# Altium PCB Lower.PcbDoc
Units mm, origin at the board's own origin, x right, y up, seen from the top; angles counter-clockwise.
Board outline 55 x 56.25 mm, 2 copper layers (Top Layer, Bottom Layer); 45 components, 39 nets, 169 pads, 32 vias.
Unrouted connection lines stored in the file: 29.
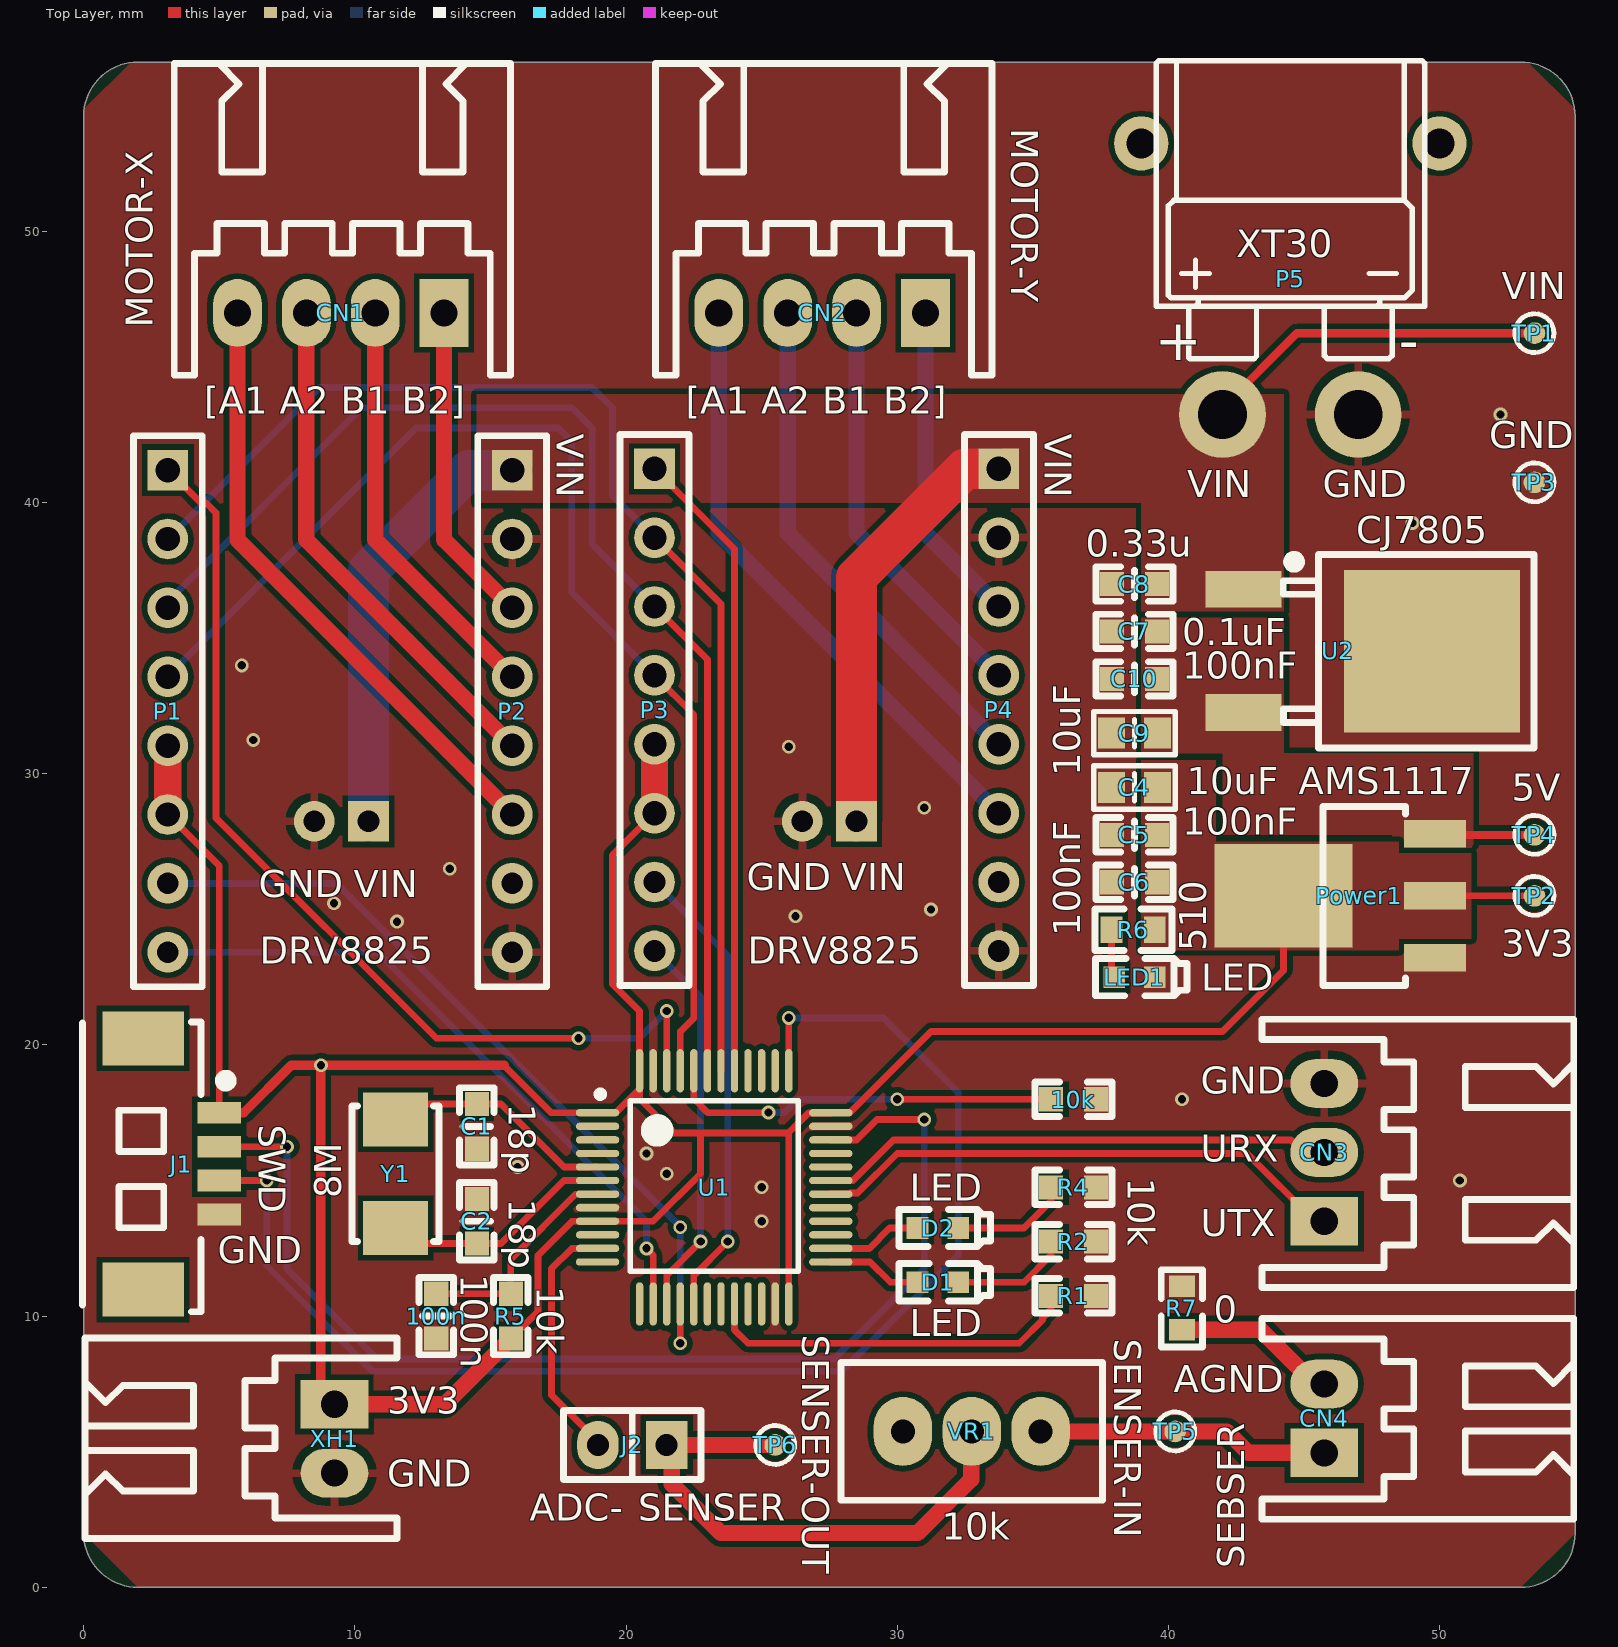
[diagram p0: Top Layer view]
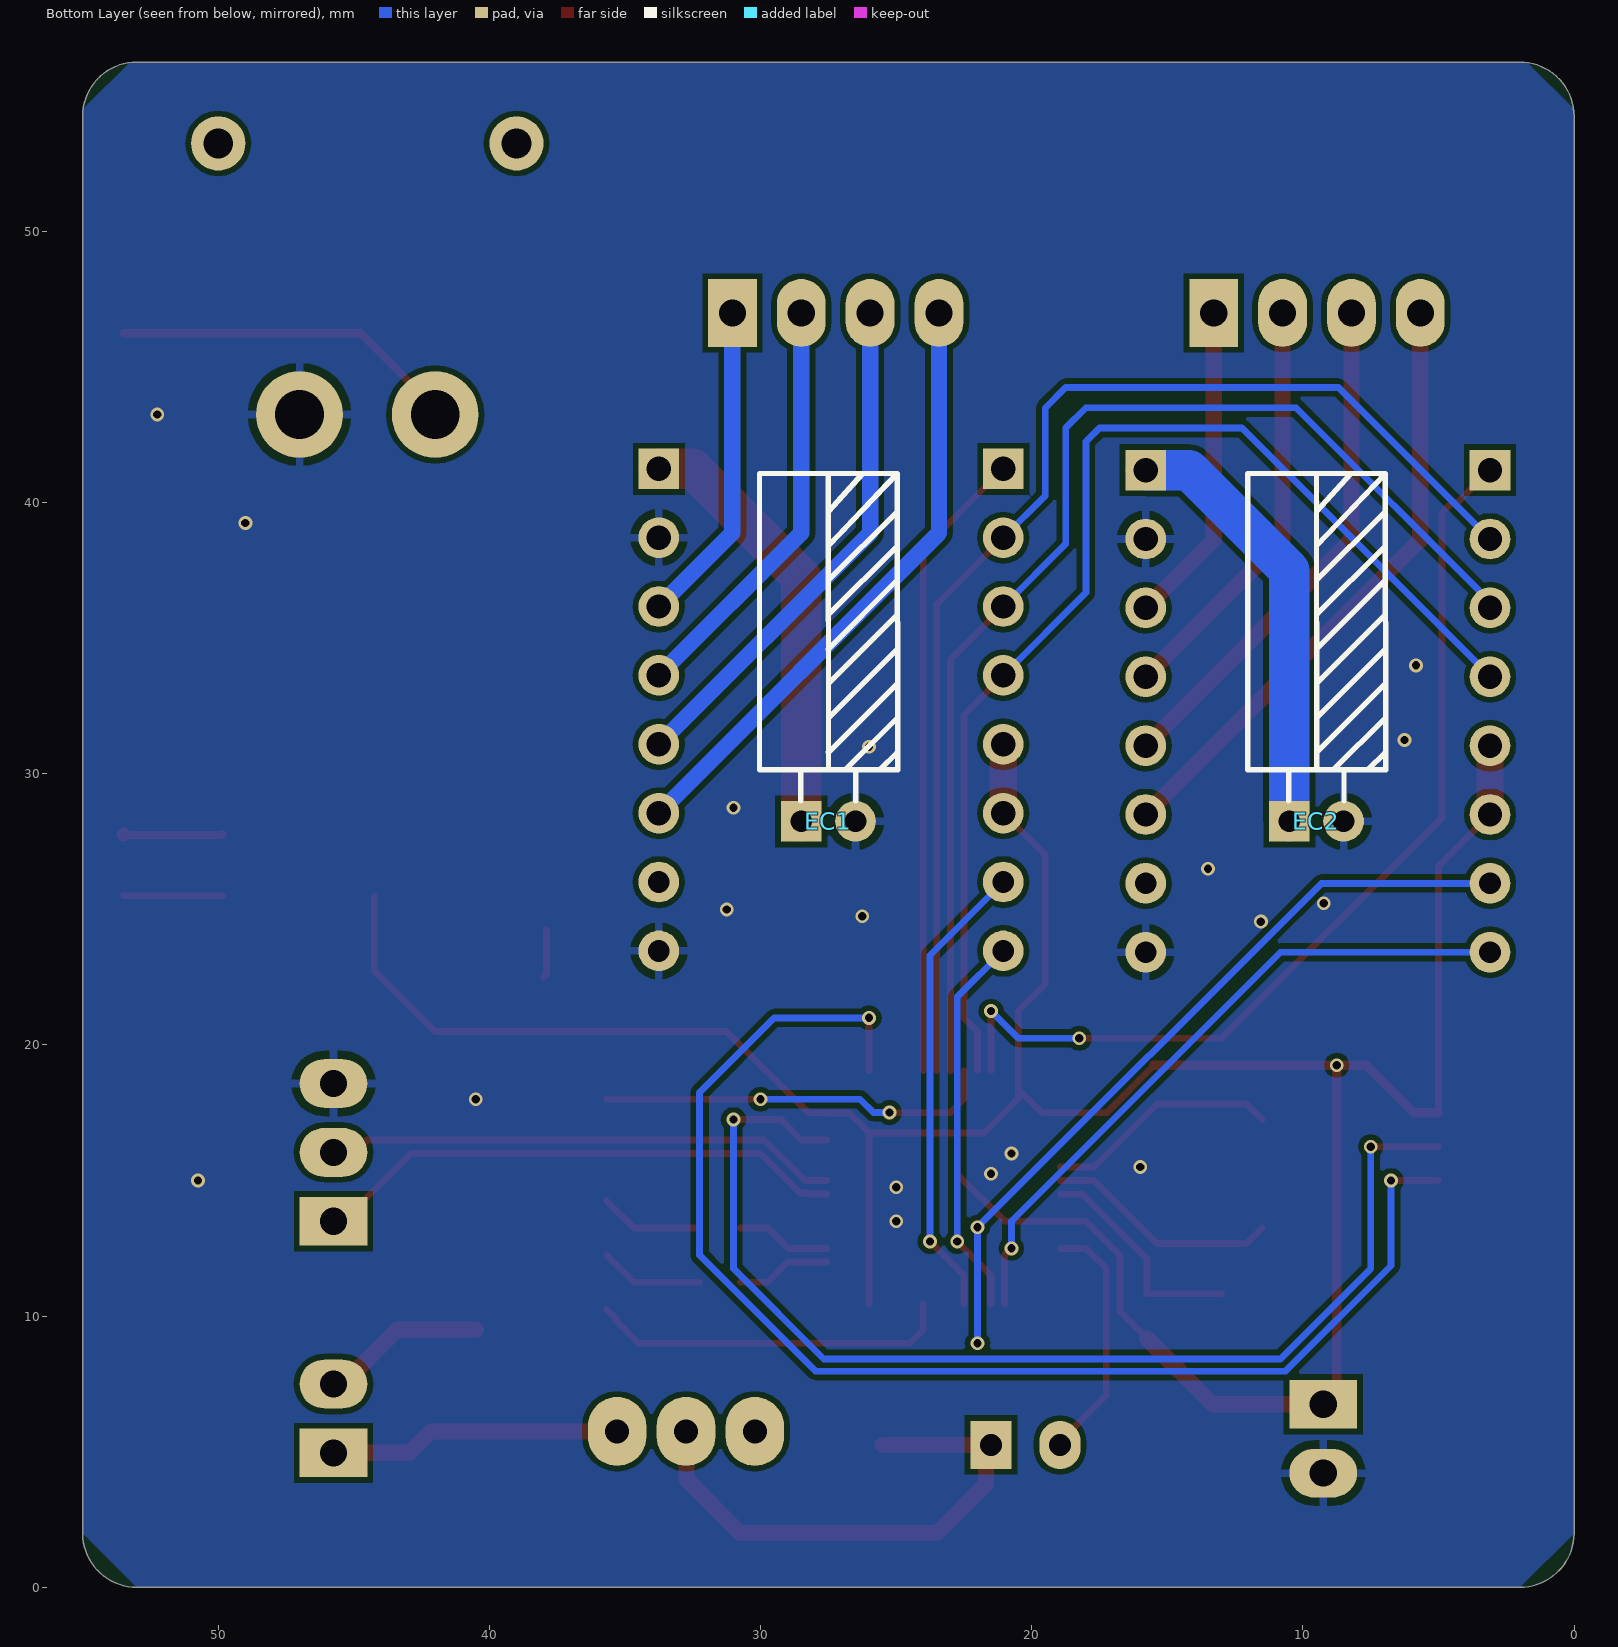
[diagram p1: Bottom Layer view, seen from below]

## Layer stack, top to bottom
Top Solder: solder mask 0.0102, Solder Resist, Dk 3.5
Top Layer: signal copper 0.0356
Dielectric 1: dielectric 0.32, FR-4, Dk 4.8
Bottom Layer: signal copper 0.0356
Bottom Solder: solder mask 0.0102, Solder Resist, Dk 3.5

## Board outline
2,0 cw(c2,2) 0,2 0,54.25 cw(c2,54.25) 2,56.25 53,56.25 cw(c53,54.25) 55,54.25 55,2 cw(c53,2) 53,0

## Design rules (kind name [scope] priority, off if disabled: settings)
Clearance [All] p1: gap=0.2 ignorepadtopadclearanceinfootprint=FALSE except(0: Arc-Hole Track-Hole SMDPad-Hole THPad-Hole Via-Hole Fill-Hole Poly-Hole Region-Hole Text-Hole)
HoleToHoleClearance [All] p1: gap=0.2 allowstackedmicrovias=TRUE
MinimumSolderMaskSliver [All] p1: minsoldermaskwidth=0.01
PolygonConnect PolygonConnect_2 [InNet('VIN')] p1: connectstyle=Direct reliefconductorwidth=0.254 reliefentries=4 polygonreliefangle="90 Angle" airgapwidth=0.254
PolygonConnect PolygonConnect_1 [IsVia] p2: connectstyle=Direct reliefconductorwidth=0.254 reliefentries=4 polygonreliefangle="90 Angle" airgapwidth=0.254
PolygonConnect [All] p3: thpad.connectstyle=Relief thpad.reliefconductorwidth=0.3 thpad.reliefentries=4 thpad.polygonreliefangle="90 Angle" thpad.airgapwidth=0.3 smdpad.connectstyle=Direct smdpad.reliefconductorwidth=0.2 smdpad.reliefentries=4 smdpad.polygonreliefangle="90 Angle" smdpad.airgapwidth=0.2 via.connectstyle=Relief via.reliefconductorwidth=0.2 via.reliefentries=4 via.polygonreliefangle="90 Angle" via.airgapwidth=0.2
RoutingVias [All] p1: holewidth=0.3 width=0.5 viastyle="Through Hole" minholewidth=0.3 minwidth=0.5 maxholewidth=0.711 maxwidth=1.27
SilkToSilkClearance [All] p1: silktosilkclearance=0
SilkToSolderMaskClearance [IsPad] p1: minsilkscreentomaskgap=0 clearancetoexposedcopper=TRUE
SolderMaskExpansion [All] p1: expansion=0.102 istentingtop=FALSE
Width Width_VIN [InNet('VIN')] p1: maxlimit=10 minlimit=0.254 preferedwidth=1
Width Width_5V [InNet('5V')] p2: maxlimit=5 minlimit=0.2 preferedwidth=0.5
Width Width_3V3 [InNet('3V3')] p3: maxlimit=5 minlimit=0.2 preferedwidth=0.35
Width Width_1 [All] p4: maxlimit=1 minlimit=0.2 preferedwidth=0.25
26 further rules are at their usual default settings.

## Components (designator, comment, footprint, x,y, rotation, side; value= is the part's Value field where it differs from the comment)
10k "10k" 0603R#1 36.5,18 r0 top value=10K (schematic designator R3)
100n "100n" 0603C 13,10 r90 top value=0.1uF (schematic designator C3)
C1 "18p" 0603C 14.5,17 r270 top
C2 "18p" 0603C 14.5,13.5 r90 top
C4 "10uF" 0805c 38.75,29.5 r0 top
C5 "100nF" 0603C 38.75,27.75 r0 top
C6 "100nF" 0603C 38.75,26 r0 top
C7 "0.1uF" 0603C 38.75,35.25 r180 top value=100pF
C8 "0.33u" 0603C 38.75,37 r180 top value=100pF
C9 "10uF" 0805c 38.75,31.5 r0 top
C10 "100nF" 0603C 38.75,33.5 r0 top
CN1 "HX25003-4A" XH4/2.54mm/90 13.29,47 r180 top
CN2 "HX25003-4A" XH4/2.54mm/90 31.04,47 r180 top
CN3 "X8821WR-03S-N0SN" XH3/2.54mm/90 45.75,13.5 r90 top
CN4 "XH2" XH2/2.54mm/90 45.75,4.96 r90 top
D1 "LED" 0603LED_B 30.75,11.25 r0 top
D2 "LED" 0603LED_B 30.75,13.25 r0 top
EC1 "DIP_ECAP" DIP-EC2.0X5X11-A 28.5,28.25 r90 bottom
EC2 "DIP_ECAP" DIP-EC2.0X5X11-A 10.5,28.25 r90 bottom
J1 "MX1.25-4P" MX1.25WS-4P 2.189,15.611 r270 top
J2 "Pin HDR1X2" "Pin HDR1X2/2.54mm-S" 21.5,5.25 r270 top
LED1 "LED" 0603LED_R 38,22.5 r0 top
P1 "DRV8825" "HEADER 8x1" 3.1,41.2 r270 top
P2 "Header8" "HEADER 8x1" 15.8,41.2 r270 top
P3 "DRV8825" "HEADER 8x1" 21.05,41.25 r270 top
P4 "Header8" "HEADER 8x1" 33.75,41.25 r270 top
P5 "XT30/60/90" XT30PW-Male 44.5,45.75 r0 top
Power1 "AMS1117" SOT223 49.838,25.5 r90 top
R1 "10k" 0603R#1 36.5,10.75 r180 top value=10K
R2 "10k" 0603R#1 36.5,12.75 r180 top value=10K
R4 "10k" 0603R#1 36.5,14.75 r180 top value=10K
R5 "10k" 0603R#1 15.75,10 r270 top value=10K
R6 "510" 0603R#2 39.5,24.25 r180 top
R7 "0" 0603R#2 40.5,9.5 r90 top
TP1 "VIN" TP_SMT 53.5,46.25 r270 top
TP2 "3V3" TP_SMT 53.5,25.5 r0 top
TP3 "GND" TP_SMT 53.5,40.75 r0 top
TP4 "5V" TP_SMT 53.5,27.75 r0 top
TP5 "SENSER-IN" TP_SMT 40.25,5.75 r90 top
TP6 "SENSER-OUT" TP_SMT 25.5,5.25 r90 top
U1 "STM32F103C8T6" LQFP_48 23.25,14.75 r0 top
U2 "CJ7805" 7805-foot 49.5,34.25 r0 top
VR1 "10k" 3296W 32.75,5.75 r180 top
XH1 "XH2" XH2/2.54mm/90 9.25,6.75 r270 top
Y1 "8M" NX5032GA 11.5,15.25 r90 top

## Footprints (in the part's own frame and the unit in brackets; to place one, negate y for a bottom-side part, rotate by r counter-clockwise, add the part's x,y. Pads: shape width x height; smd on the part's side, far side on the other; paste and mask are expansions set on the pad)
0603C [mil] "Chip Resistor, 2-Leads, Body 1.6x0.8mm, IPC Medium Density"
  rect 35x35 smd: 1(-32.5,0) 2(32.5,0)
  silkscreen extent -56,-25 56,25, body extent -31,-16 31,15, height 18
0603LED_B [mm]
  rect 0.8x0.8 smd: 1(0,0) 2(1.5,0)
  silkscreen extent -0.69,-0.69 2.69,0.69, body extent -0.04,-0.4 1.56,0.4, height 0.6
0603LED_R [mm]
  rect 0.8x0.8 smd: 1(0,0) 2(1.5,0)
  silkscreen extent -0.69,-0.69 2.69,0.69, body extent -0.06,-0.4 1.54,0.4, height 0.6
0603R#1 [mil] "10mil丝印"
  rect 35x35 smd: 1(-32.5,0) 2(32.5,0)
  silkscreen extent -56,-25 56,25, body extent -33,-16 33,16, height 22
0603R#2 [mil]
  rect 31.5x37.99 smd: 1(0,0) 2(62.99,0)
  silkscreen extent -25,-30 87,30, body extent -1,-16 61,16, height 18
0805c [mm]
  rect 1x1.14 smd: 1(-0.85,0) 2(0.85,0)
  silkscreen extent -1.5,-0.8 1.5,0.8, body extent -1,-0.62 1,0.62, height 0.8
3296W [mil]
  oval 85x100 hole 35: 1(-100,0) 2(0,0) 3(100,0)
  silkscreen extent -190,-100 190,100, body extent -188,-94 188,94, height 455
7805-foot [mm]
  rect 2.8x1.35 smd: 1(-6.728,2.563) 3(-6.728,-1.987)
  rect 6.5x6 smd: 4(0.222,0.271)
  silkscreen extent -5.26,-3.3 3.99,3.84
DIP-EC2.0X5X11-A [mm]
  rect 1.5x1.5 hole 0.8: 1(0,0)
  round 1.5 hole 0.8: 2(0,-2)
  silkscreen extent 0.76,-3.55 12.83,1.54, body extent -0.25,-3.52 12.96,1.49, height 5.02
"HEADER 8x1" [mm] "2.54mm排针"
  rect 1.5x1.5 hole 0.9: 1(0,0)
  round 1.5 hole 0.9: 2(2.54,0) 3(5.08,0) 4(7.62,0) 5(10.16,0) 6(12.7,0)
  round 1.5 hole 0.8: 7(15.24,0) 8(17.78,0)
  silkscreen extent -1.27,-1.27 19.05,1.27, body extent -1.27,-1.27 19.05,1.27, height 6.39
LQFP_48 [mm] "TSQFP, 48-Leads, Body 7.00x7.00mm, Pitch 0.50mm, IPC Medium Density"
  oval 1.6x0.27 smd: 1(-4.3,2.75) 2(-4.3,2.25) 3(-4.3,1.75) 4(-4.3,1.25) 5(-4.3,0.75) 6(-4.3,0.25) 7(-4.3,-0.25) 8(-4.3,-0.75) 9(-4.3,-1.25) 10(-4.3,-1.75) 11(-4.3,-2.25) 12(-4.3,-2.75) 25(4.3,-2.75) 26(4.3,-2.25) 27(4.3,-1.75) 28(4.3,-1.25) 29(4.3,-0.75) 30(4.3,-0.25) 31(4.3,0.25) 32(4.3,0.75) 33(4.3,1.25) 34(4.3,1.75) 35(4.3,2.25) 36(4.3,2.75)
  oval 0.27x1.6 smd: 13(-2.75,-4.3) 14(-2.25,-4.3) 15(-1.75,-4.3) 16(-1.25,-4.3) 17(-0.75,-4.3) 18(-0.25,-4.3) 19(0.25,-4.3) 20(0.75,-4.3) 21(1.25,-4.3) 22(1.75,-4.3) 23(2.25,-4.3) 24(2.75,-4.3) 37(2.75,4.3) 38(2.25,4.3) 39(1.75,4.3) 40(1.25,4.3) 41(0.75,4.3) 42(0.25,4.3) 43(-0.25,4.3) 44(-0.75,4.3) 45(-1.25,4.3) 46(-1.75,4.3) 47(-2.25,4.3) 48(-2.75,4.3)
  silkscreen extent -4.32,-3.1 3.1,3.56, body extent -4.5,-4.5 4.5,4.5, height 1.5
MX1.25WS-4P [mm]
  rect 2x3 smd: 0(-4.632,0) 0(4.632,0)
  rect 0.8x1.6 smd: 1(-1.889,2.811) 2(-0.639,2.811) 3(0.611,2.811) 4(1.861,2.811)
  silkscreen extent -5.23,-2.23 5.45,3.25, body extent -5.15,-1.96 5,3.23, height 3.4
NX5032GA [mm] "贴片晶振，5mm x 3.2mm"
  rect 2x2.4 smd: 1(-2,0) 2(2,0)
  silkscreen extent -2.5,-1.6 2.5,1.6, body extent -2.5,-1.6 2.5,1.6, height 1.3
"Pin HDR1X2/2.54mm-S" [mil]
  rect 70x60 hole 32: 1(0,0)
  oval 70x60 hole 32: 2(0,-100)
  silkscreen extent -50,-150 50,50, body extent -50,-150 50,50, height 336
SOT223 [mil]
  rect 40x90 smd: 1(-90,0) 2(0,0) 3(90,0)
  rect 150x200 smd: 2(0,220)
  silkscreen extent -130,43 130,163, body extent -130,-30 126,246, height 65
TP_SMT [mm]
  round 0.8 smd: 1(0,0)
  silkscreen extent -0.72,-0.72 0.72,0.72
XH2/2.54mm/90 [mm]
  rect 1.8x2.5 hole 1: 1(0,0)
  oval 1.8x2.5 hole 1: 2(2.54,0)
  silkscreen extent -2.45,-9.2 4.95,2.3, body extent -2.45,-9.2 4.95,2.3, height 6.1
XH3/2.54mm/90 [mm]
  rect 1.8x2.5 hole 1: 1(0,0)
  oval 1.8x2.5 hole 1: 2(2.54,0) 3(5.08,0)
  silkscreen extent -2.45,-9.2 7.45,2.3, body extent -2.45,-9.2 7.45,2.3, height 6.1
XH4/2.54mm/90 [mm]
  rect 1.8x2.5 hole 1: 1(0,0)
  oval 1.8x2.5 hole 1: 2(2.54,0) 3(5.08,0) 4(7.62,0)
  silkscreen extent -2.45,-9.2 9.95,2.3, body extent -2.45,-9.2 9.95,2.3, height 6.1
XT30PW-Male [mm] "XT30卧式公头插座"
  round 2 hole 1.1: 0(-5.5,7.5) 0(5.5,7.5)
  round 3.2 hole 1.8: 1(-2.5,-2.5) 2(2.5,-2.5)
  silkscreen extent -4.95,-0.45 4.95,10.55, body extent -6.65,-3.4 6.65,10.55, height 5

## Part data
10k R1 R2 R4 R5: library part R0603, "Resistor", LatestRevisionDate=17-Jul-2002, LatestRevisionNote="Re-released for DXP Platform.", PackageDescription="Axial Device, Thru-Hole; 2 Leads; 0.3 in Pin Spacing", PackageReference=AXIAL-0.3, Published=8-Jun-2000, Publisher="Altium Limited"
100n: library part C0603, "Capacitor", LatestRevisionDate=17-Jul-2002, LatestRevisionNote="Re-released for DXP Platform.", PackageDescription="Radial Cap, Thru-Hole; 2 Leads; 0.3 in Pin Spacing", PackageReference=RAD-0.3, Published=8-Jun-2000, Publisher="Altium Limited"
C1 C2 C7 C8: library part Cap, "Capacitor", LatestRevisionDate=17-Jul-2002, LatestRevisionNote="Re-released for DXP Platform.", PackageDescription="Radial Cap, Thru-Hole; 2 Leads; 0.3 in Pin Spacing", PackageReference=RAD-0.3, Published=8-Jun-2000, Publisher="Altium Limited"
C4 C5 C6 C9 C10: library part CAP, "无极性电容"
CN1 CN2: BOM_Manufacturer="HX(Zhejiang Yueqing Hongxing Elec)", BOM_Manufacturer Part=HX25003-4A, BOM_Supplier=LCSC, BOM_Supplier Part=C442301, Contributor=LCSC, spicePre=C, spiceSymbolName=HX25003-4A
CN3: BOM_Manufacturer="XKB Enterprise", BOM_Manufacturer Part=X8821WR-03S-N0SN, BOM_Supplier=LCSC, BOM_Supplier Part=C388740, Contributor=LCSC, spicePre=C, spiceSymbolName=X8821WR-03S-N0SN
D1 D2: library part D0603, "Typical RED, GREEN, YELLOW, AMBER GaAs LED", LatestRevisionDate=17-Jul-2002, LatestRevisionNote="Re-released for DXP Platform.", PackageDescription="SM LED; 2 Flat Leads", PackageReference=3.2X1.6X1.1, PackageVersion=Feb-2002, Published=8-Jun-2000, Publisher="Altium Limited"
EC1 EC2: "直插电解电容"
LED1: "Typical RED, GREEN, YELLOW, AMBER GaAs LED", LatestRevisionDate=17-Jul-2002, LatestRevisionNote="Re-released for DXP Platform.", PackageDescription="SM LED; 2 Flat Leads", PackageReference=3.2X1.6X1.1, PackageVersion=Feb-2002, Published=8-Jun-2000, Publisher="Altium Limited"
P1 P2 P3 P4: library part "Header 8"
Power1: "三端稳压芯片"
R6 R7: library part RES
TP1 TP2 TP3 TP4 TP5 TP6: library part TP, "Test Point"
U1: "LowPower MCU"
U2: library part "CJ7805 3%", BOM_LCSC Assembly=Yes, BOM_Manufacturer=CJ, BOM_Manufacturer Part="CJ7805 3%", BOM_Supplier=LCSC, BOM_Supplier Part=C21706, image=//image.lceda.cn/szlcsc/C21706.jpg, SMT Type=Extend, spicePre=U, spiceSymbolName="CJ7805 3%"
VR1: library part RESVR
Y1: library part XTAL, "Crystal Oscillator", LatestRevisionDate=17-Jul-2002, LatestRevisionNote="Re-released for DXP Platform.", PackageDescription="Crystal, Thru-Hole; 2 Leads; Body 3.1 x 8.2 mm (Dia.xH)", PackageReference=R38, Published=8-Jun-2000, Publisher="Altium Limited"

## Via types
v1: diameter 0.508/0.508 (per signal layer), hole 0.305, Top Layer to Bottom Layer, tented both sides, 32 vias

## Nets (pads, with @x,y where several pads share a name; then routed paths per layer and width w, separated by ;. In a path a pad name is that pad's centre, name@x,y a point inside that pad or via, vN(x,y) a via of type N, cw(c..) or ccw(c..) an arc to the next point about the centre after c; other vN are vias at no path point)
3V3: C4.2 C5.2 C6.2 J1.1 P1.5 P1.6 P3.5 P3.6 Power1.2 R5.2 R6.1 TP2.1 U1.1 U1.9 U1.24 U1.36 U1.48 XH1.1 | length 117.7
  Top Layer w0.25: P1.6 5,26.6 J1.1 ; 15.5,19.25 17.25,17.5 U1.1 19.615,17.5 U1.48@20.5,18.385 ; R5.2 16.75,10.175 16.75,12.24 18.006,13.496 18.946,13.496 18.954,13.504 21.004,13.504 22.75,15.25 22.75,16.75 ; P3.6 19.5,27 19.5,22.25 20.5,21.25 U1.48 U1.48@20.5,18.385 ; 25.984,16.75 22.75,16.75 ; U1.24 26,16.766 26.731,17.496 27.546,17.496 U1.36 27.554,17.504 28.254,17.504 31.25,20.5 42,20.5 44.25,22.75 Power1.2@44.25,25.5 ; Power1.2@49.838,25.5 TP2.1 ; U1.48@20.5,18.385 20.5,18.017 21.767,16.75 22.75,16.75
  Top Layer w0.35: J1.1 5.9,17.5 7.65,19.25 v1(8.75,19.25) ; XH1.1@9,7 8.75,7.25 v1(8.75,19.25) ; 15.5,19.25 v1(8.75,19.25)
  Top Layer w0.6: XH1.1@9,7 XH1.1 13.325,6.75 R5.2
  Top Layer w1: P1.6 P1.5 ; P3.6 P3.5
5V: C7.1 C9.2 C10.2 Power1.3 TP4.1 U2.3 | length 3.7
  Top Layer w0.3: Power1.3 49.874,27.75 TP4.1
  Top Layer w0.5: TP4.1@53.482,27.768 TP4.1
ADC_IN: J2.2 U1.11 | length 9.2
  Top Layer w0.25: U1.11 18,12.5 17.25,11.75 17.25,7.087 18.96,5.377 J2.2
AGND: CN4.2 R7.1 | length 6.1
  Top Layer w0.6: R7.1 43.4,9.5 45.4,7.5 CN4.2
BOOT0: 10k.1 U1.44 | length 14.6
  Top Layer w0.25: U1.44 22.5,18.017 23.017,17.5 25.24,17.5 v1(25.25,17.51) ; v1(30,18) 10k.1
  Bottom Layer w0.25: v1(25.25,17.51) 25.84,17.51 26.33,18 v1(30,18)
BOOT1: R1.2 U1.20 | length 13.4
  Top Layer w0.25: U1.20 24.004,10.446 24.004,9.496 24.5,9 34.5,9 35.355,9.855 35.355,9.93 35.675,10.25
D_SWCLK: J1.3 U1.37 | length 49.1
  Top Layer w0.25: J1.3 v1(6.75,15) ; U1.37 v1(26,21)
  Bottom Layer w0.25: v1(6.75,15) 6.75,11.86 10.639,7.971 27.971,7.971 32.25,12.25 32.25,18.25 29.5,21 v1(26,21)
D_SWDIO: J1.2 U1.34 | length 42.5
  Top Layer w0.25: J1.2 v1(7.5,16.25) ; U1.34 28.5,16.5 29.25,17.25 v1(31,17.25)
  Bottom Layer w0.25: v1(7.5,16.25) 7.5,11.746 10.825,8.421 27.671,8.421 31,11.75 v1(31,17.25)
GND: 10k.2 100n.1 C1.2 C2.2 C4.1 C5.1 C6.1 C7.2 C8.2 C9.1 C10.1 CN3.3 EC1.2 EC2.2 J1.4 LED1.2 P2.2 P2.8 P4.2 P4.8 P5.2 Power1.1 R1.1 R2.1 R4.1 R7.2 TP3.1 U1.8 U1.23 U1.35 U1.47 U2.4 XH1.2
  other v1: 25,13.5 25,14.75 50.75,15 21.5,15.25 16,15.5 20.75,16 40.5,18 11.55,24.55 26.25,24.75 31.25,25 9.231,25.231 13.5,26.5 31,28.75 26,31 6.25,31.25 5.829,34 49,39.25 52.25,43.25
LED1: D1.1 U1.25 | length 3.5
  Top Layer w0.25: U1.25 29,12 29.75,11.25 D1.1
LED2: D2.1 U1.26 | length 3.5
  Top Layer w0.25: U1.26 28.973,12.5 29.723,13.25 D2.1
MODE0: P1.2 P3.2 U1.42 | length 45.1
  Top Layer w0.25: P3.2 23.5,36.26 U1.42
  Bottom Layer w0.25: P1.2 8.69,44.25 18.75,44.25 19.5,43.5 19.5,40.26 P3.2
MODE1: P1.3 P3.3 U1.43 | length 44.6
  Top Layer w0.25: P3.3 23,34.22 U1.43
  Bottom Layer w0.25: P1.3 3.1,36.35 10.25,43.5 18,43.5 18.75,42.75 18.75,38.47 P3.3
MODE2: P1.4 P3.4 U1.45 | length 44.2
  Top Layer w0.25: P3.4 22.5,32.18 22.5,21 22,20.5 U1.45
  Bottom Layer w0.25: P1.4 3.1,33.6 12.25,42.75 17.5,42.75 18,42.25 18,36.68 P3.4
NetC1_1: C1.1 U1.5 Y1.2 | length 8.7
  Top Layer w0.25: Y1.2 12.075,17.826 C1.1 15.387,17.826 17.712,15.5 U1.5
NetC2_1: C2.1 U1.6 Y1.1 | length 8.7
  Top Layer w0.25: Y1.1 12.075,12.675 C2.1 15.387,12.675 17.712,15 U1.6
NetC3_2: 100n.2 R5.1 U1.7 | length 8.2
  Top Layer w0.25: 100n.2 R5.1 15.75,12.116 18.131,14.496 18.946,14.496 U1.7
NetD1_2: D1.2 R2.2 | length 3.8
  Top Layer w0.25: D1.2 34.675,11.25 35.675,12.25
NetD2_2: D2.2 R4.2 | length 3.8
  Top Layer w0.25: D2.2 34.674,13.25 35.675,14.25
NetLED1_1: LED1.1 R6.2 | length 1.8
  Top Layer w0.25: R6.2 37.9,22.6 LED1.1
SENSER_IN: CN4.1 TP5.1 VR1.1 | length 10.8
  Top Layer w0.6: VR1.1 TP5.1 42.157,5.75 42.947,4.96 CN4.1
SENSER_OUT: J2.1 TP6.1 VR1.2 | length 19.9
  Top Layer w0.6: TP6.1 J2.1 21.688,5.062 21.688,3.812 23.5,2 30.75,2 32.73,3.98 32.73,5.73 VR1.2
UART1_RX: CN3.2 U1.31 | length 19
  Top Layer w0.25: U1.31 27.554,15.004 28.369,15.004 29.866,16.5 44.521,16.5 44.981,16.04 CN3.2
UART1_TX: CN3.1 U1.30 | length 19.9
  Top Layer w0.25: U1.30 28.22,14.5 28.26,14.54 28.542,14.54 30.002,16 42.9,16 45.4,13.5 CN3.1
VIN: C8.1 EC1.1 EC2.1 P2.1 P4.1 P5.1 TP1.1 U2.1 | length 44.9
  Top Layer w0.3: P5.1 42,43.5 44.75,46.25 TP1.1
  Top Layer w1.5: EC1.1 28.5,37.25 32.5,41.25 P4.1
  Bottom Layer w1.5: EC2.1 10.5,37.5 14.2,41.2 P2.1
xA1: CN1.4 P2.6 | length 22.7
  Top Layer w0.6: CN1.4 5.67,38.63 P2.6
xA2: CN1.3 P2.5 | length 19.1
  Top Layer w0.6: CN1.3 8.21,38.63 P2.5
xB1: CN1.2 P2.4 | length 15.5
  Top Layer w0.6: CN1.2 10.75,38.63 P2.4
xB2: CN1.1 P2.3 | length 11.9
  Top Layer w0.6: CN1.1 13.29,38.63 P2.3
xDIR: P1.8 U1.14 | length 24.9
  Top Layer w0.25: v1(20.75,12.5) 21,12.25 U1.14
  Bottom Layer w0.25: P1.8 10.83,23.42 20.75,13.5 v1(20.75,12.5)
xE\N\A\B\L\E\: P1.1 U1.46 | length 36.3
  Top Layer w0.25: P1.1 4.3,40 4.5,40 4.875,39.625 4.875,28.375 13,20.25 v1(18.25,20.25) ; U1.46 v1(21.5,21.25)
  Bottom Layer w0.25: v1(18.25,20.25) 20.5,20.25 v1(21.5,21.25)
xSTEP: P1.7 U1.16 | length 29.9
  Top Layer w0.25: v1(22,9) U1.16
  Bottom Layer w0.25: P1.7 9.321,25.96 v1(22,13.281) v1(22,9)
yA1: CN2.4 P4.6 | length 22.7
  Bottom Layer w0.6: CN2.4 23.42,38.88 P4.6
yA2: CN2.3 P4.5 | length 19.1
  Bottom Layer w0.6: CN2.3 25.96,38.88 P4.5
yB1: CN2.2 P4.4 | length 15.5
  Bottom Layer w0.6: CN2.2 28.5,38.88 P4.4
yB2: CN2.1 P4.3 | length 12
  Bottom Layer w0.6: CN2.1 31.04,38.88 P4.3
yDIR: P3.8 U1.15 | length 14.2
  Top Layer w0.25: U1.15 21.5,11.5 v1(22.75,12.75)
  Bottom Layer w0.25: P3.8 22.75,21.77 v1(22.75,12.75)
yE\N\A\B\L\E\: P3.1 U1.41 | length 23.4
  Top Layer w0.25: P3.1 24,38.3 U1.41
ySTEP: P3.7 U1.17 | length 17.2
  Top Layer w0.25: U1.17 22.5,11.5 v1(23.75,12.75)
  Bottom Layer w0.25: P3.7 23.75,23.31 v1(23.75,12.75)
pads on no net: J1.0 P2.7 P4.7 P5.0 U1.2 U1.3 U1.4 U1.10 U1.12 U1.13 U1.18 U1.19 U1.21 U1.22 U1.27 U1.28 U1.29 U1.32 U1.33 U1.38 U1.39 U1.40 VR1.3

## Polygon pours and split planes (outlines as drawn)
GND on Top Layer "GND_L01_P013" (solid, remove dead copper, pour order 13): 2,0 53,0 55,2 55,54.5 53.25,56.25 1.75,56.25 0,54.5 0,2
VIN on Top Layer "VIN_L01_P000" (solid, remove dead copper, pour order 0): 44.25,36 44.25,44 14.5,44 14.5,40 39,40 39,36
5V on Top Layer "5V_L01_P006" (solid, remove dead copper, pour order 6): 42,34
5V on Top Layer "5V_L01_P005" (solid, remove dead copper, pour order 5): 39,35.75 44.25,35.75 44.25,30.75 51.25,30.75 51.25,27 48.25,27 48.25,27.75 42,27.75 42,30.75 39,30.75
3V3 on Top Layer "3V3_L01_P003" (solid, remove dead copper, pour order 3): 39,30.5 41.75,30.5 41.75,27.5 51.169,27.5 51.169,23.5 39,23.5
GND on Bottom Layer "GND_L02_P014" (solid, remove dead copper, pour order 14): 1.75,56.25 0,54.5 0,2 2,0 53,0 55,2 55,54.5 53.25,56.25
no net on Bottom Layer "NONET_L02_P008" (solid, remove dead copper, pour order 8): 0,53
no net on Bottom Overlay "GND_L02_P-001" (solid, remove dead copper): -7.75,15.75

## Silkscreen, mask and mechanical layers (free items; w line width, h text height)
Top Overlay:
  text "MOTOR-Y" at 34.2,53.8 h1 r270
  text "MOTOR-X" at 2.55,46.45 h1 r90
  text "[A1 A2 B1 B2]" at 4.45,43.283 h1
  text "[A1 A2 B1 B2]" at 22.2,43.283 h1
  text "VIN" at 17.45,42.55 h1 r270
  text "VIN" at 35.45,42.55 h1 r270
  text "VIN" at 40.7,40.2 h1
  text "GND" at 45.7,40.2 h1
  text "GND" at 24.45,25.7 h1
  text "VIN" at 27.95,25.7 h1
  text "GND" at 6.45,25.45 h1
  text "VIN" at 9.95,25.45 h1
  text "GND" at 41.2,18.2 h1
  text "SWD" at 6.45,17.05 h1 r270
  text "URX" at 41.2,15.7 h1
  text "UTX" at 41.2,12.95 h1
  text "GND" at 4.95,11.95 h1
  text "AGND" at 40.2,7.2 h1
  text "3V3" at 11.2,6.4 h1
  text "GND" at 11.2,3.7 h1
  text "ADC-" at 16.45,2.45 h1
  text "SENSER" at 20.45,2.45 h1
  text "SEBSER" at 42.8,0.7 h1 r90
Mechanical 1:
  the board outline again, w0.254

## Text inside footprints (layer, text, board x,y; h text height)
P5: Top Overlay "XT30" at 42.5,49.05 h1.02; Top Overlay "+" at 39.5,45.25 h1.52; Top Overlay "-" at 48.5,45.25 h1.52